# Altium PCB Lab7_Voloschuk.PcbDoc
Units mil, origin at the board's own origin, x right, y up, seen from the top; angles counter-clockwise.
Board outline 4800 x 4400 mil, 2 copper layers (Top Layer, Top, Bottom Layer, Bottom); 13 components, 9 nets, 32 pads, 3 vias.
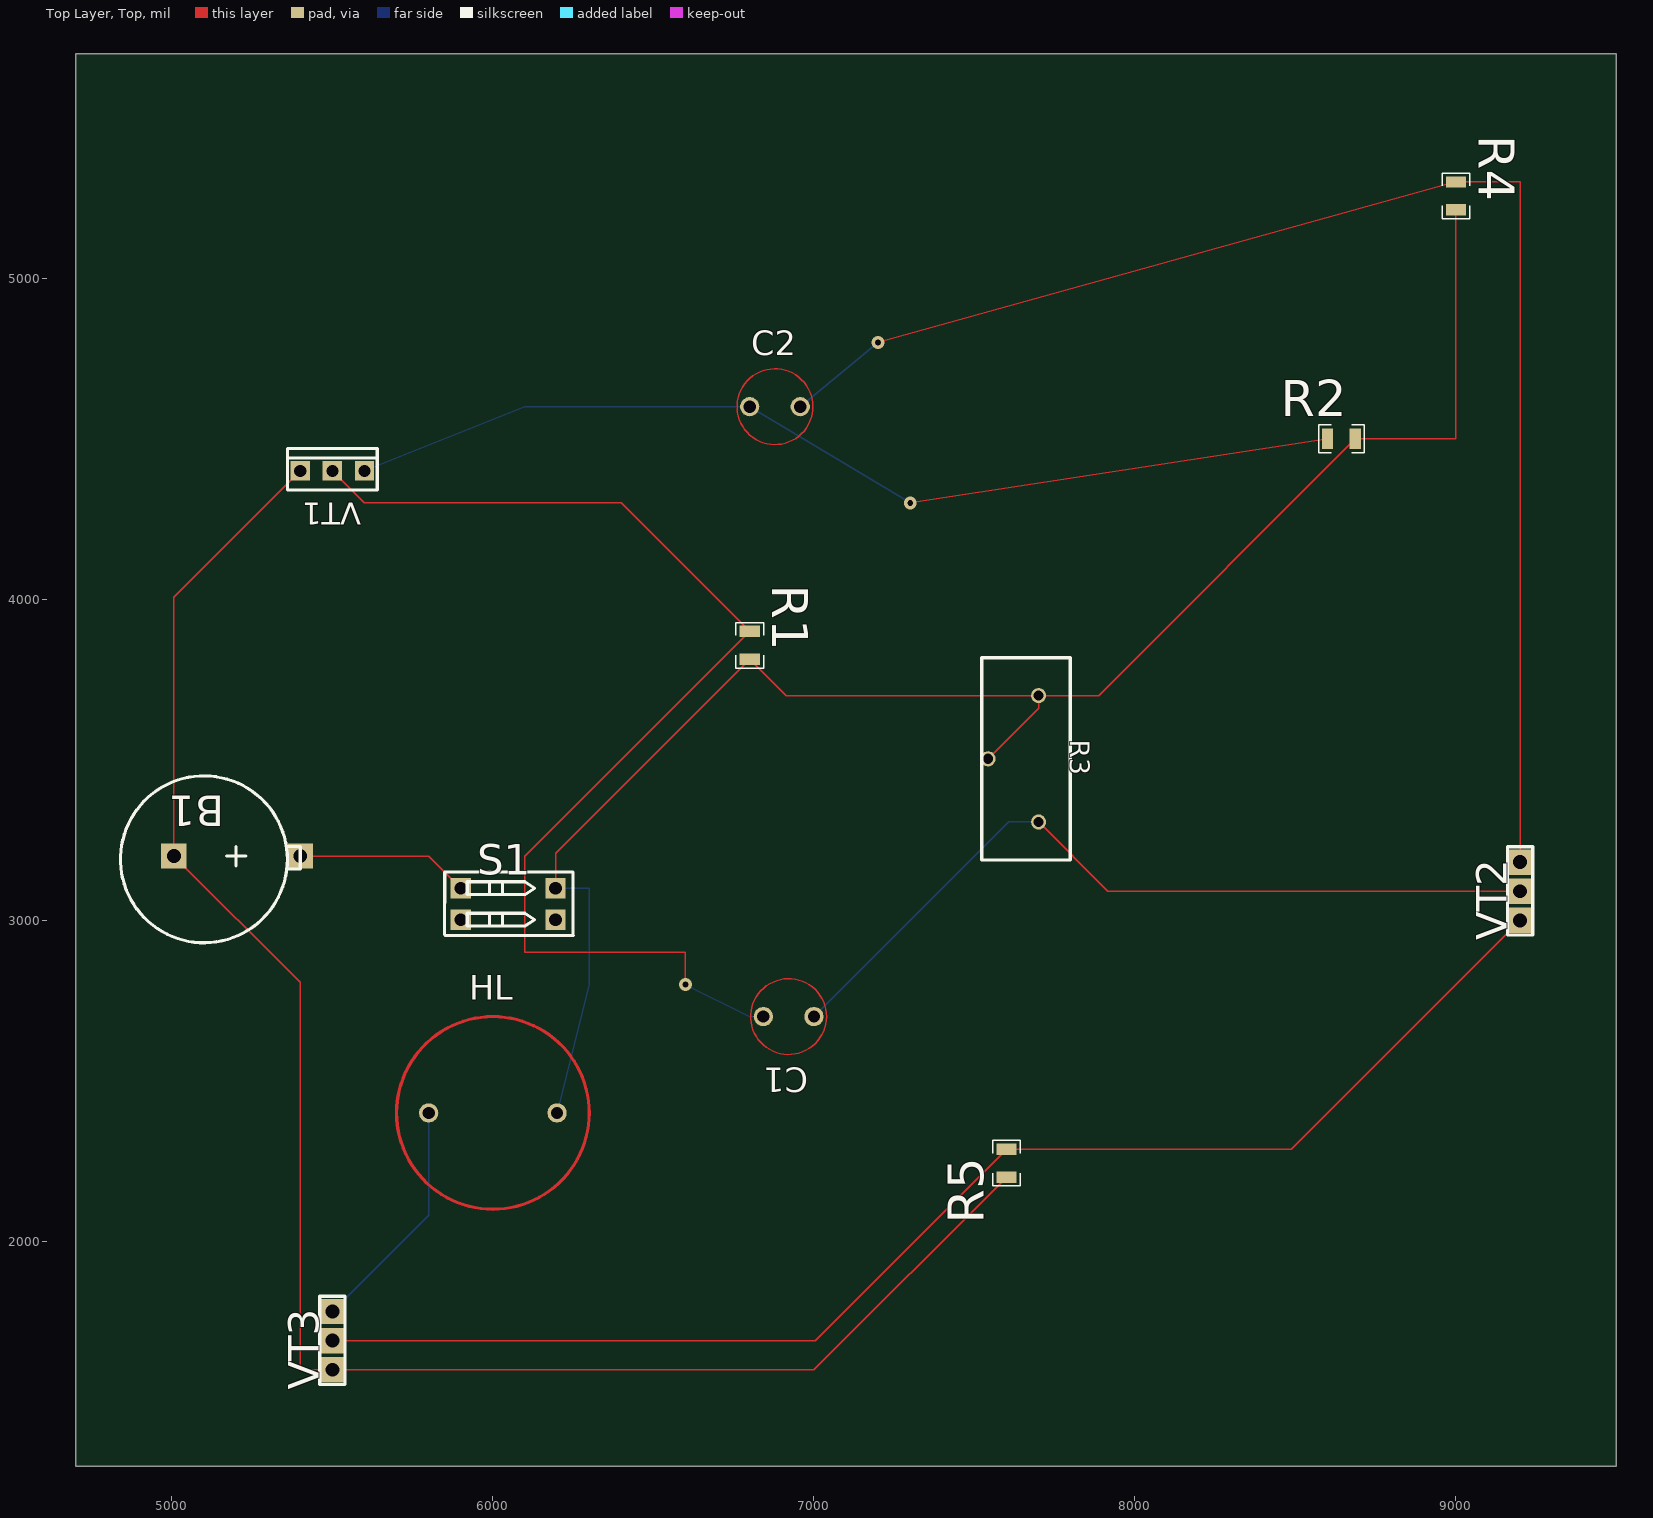
[diagram p0: Top Layer, Top view]
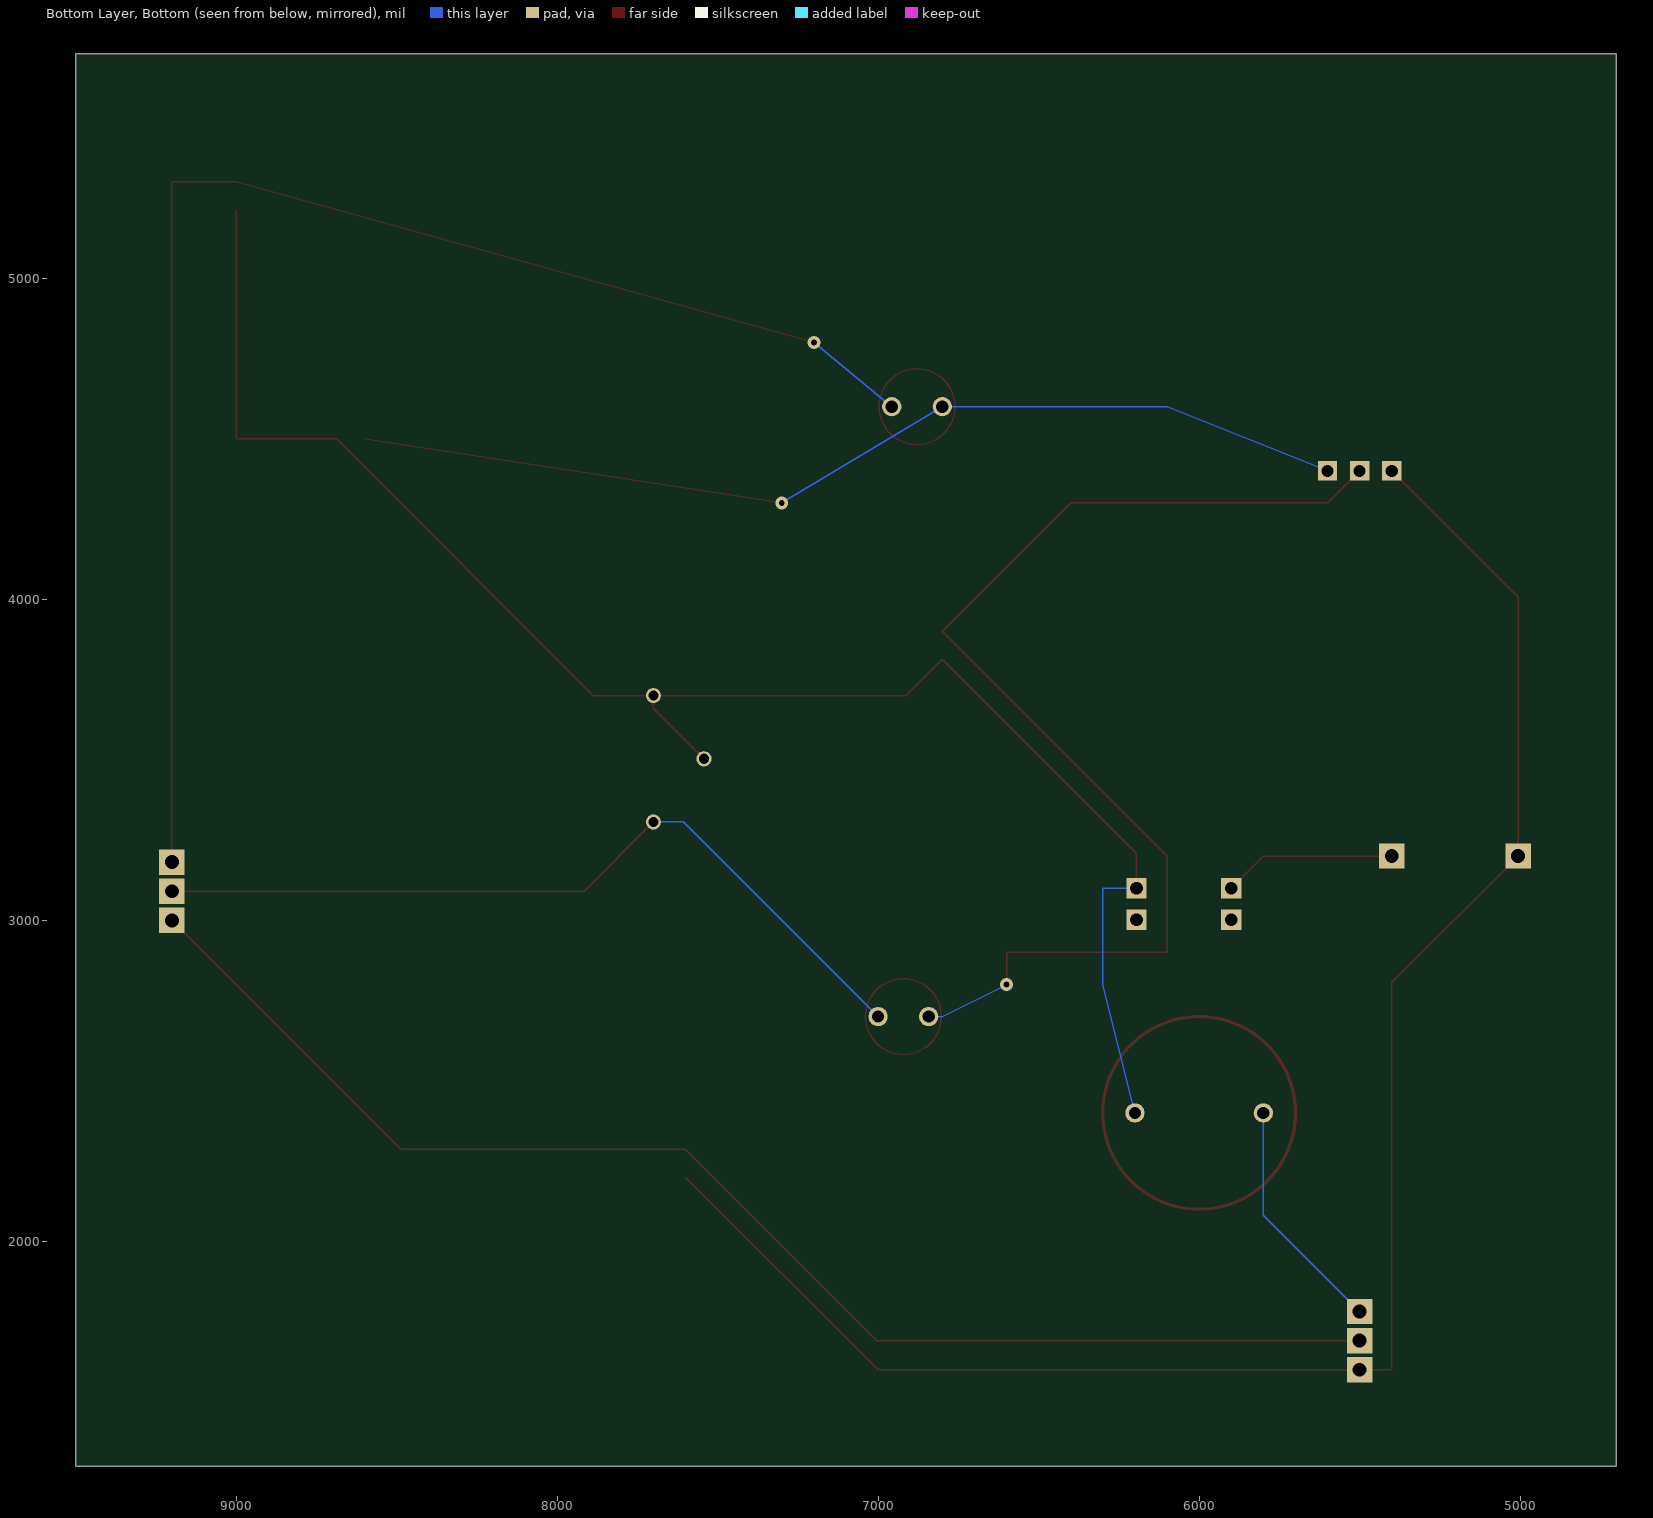
[diagram p1: Bottom Layer, Bottom view, seen from below]

## Layer stack, top to bottom
Top Solder, Top Mask: solder mask 0.4, Solder Resist, Dk 3.5
Top Layer, Top: signal copper 1.4
Dielectric 1: dielectric 12.6, FR-4, Dk 4.8
Bottom Layer, Bottom: signal copper 1.4
Bottom Solder, Bot Mask: solder mask 0.4, Solder Resist, Dk 3.5

## Board outline
4700,1300 9500,1300 9500,5700 4700,5700

## Design rules (kind name [scope] priority, off if disabled: settings)
Clearance [All] p1: gap=10 ignorepadtopadclearanceinfootprint=FALSE except(0: Arc-Hole Track-Hole SMDPad-Hole THPad-Hole Via-Hole Fill-Hole Poly-Hole Region-Hole Text-Hole; 11.81: Arc-Arc Arc-Track Arc-THPad Arc-Via Track-Track Track-THPad Track-Via THPad-THPad THPad-Via Via-Via)
PlaneClearance [All] p1: clearance=10
PolygonConnect [All] p1: connectstyle=Relief reliefconductorwidth=10 reliefentries=4 polygonreliefangle="90 Angle" airgapwidth=10
RoomDefinition "" [All] p1: confinementstyle=ConfineIn formatcopy=TRUE lockcomponents=FALSE outline 4700,1300 9500,1300 9500,5700 4700,5700
RoutingVias [All] p1: holewidth=28 width=50 viastyle="Through Hole" minholewidth=28 minwidth=50 maxholewidth=28 maxwidth=50
SolderMaskExpansion [All] p1: expansion=4
Width [All] p1: maxlimit=10 minlimit=10 preferedwidth=10
29 further rules are at their usual default settings.

## Components (designator, comment, footprint, x,y, rotation, side; value= is the part's Value field where it differs from the comment)
B1 "4,5B" BATAR 5400,3200 r180 top
C1 "50mk x 6B" CAP2 7000,2700 r180 top
C2 "10mk x 6B" CAP2 6800,4600 r0 top
HL "{Value}" HL 5800,2400 r0 top
R1 "1.5k" SMD_08_05 6800,3900 r270 top
R2 "20k" SMD_08_05 8600,4500 r0 top
R3 "150k" ÑÏ3-38Â 7700,3700 r270 top
R4 "1.5k" SMD_08_05 9000,5300 r270 top
R5 "160" SMD_08_05 7600,2200 r90 top
S1 "" BDM1-2 5900,3100 r0 top
VT1 "{Value}" 室315 5600,4400 r180 top
VT2 "" KT27 9200,3000 r90 top
VT3 "" KT27 5500,1600 r90 top

## Footprints (in the part's own frame and the unit in brackets; to place one, negate y for a bottom-side part, rotate by r counter-clockwise, add the part's x,y. Pads: shape width x height; smd on the part's side, far side on the other; paste and mask are expansions set on the pad)
BATAR [mm]
  rect 2x2 hole 1.1: 1(0,0) 2(10,0)
  silkscreen extent 0,-6.35 14.22,6.86
BDM1-2 [mm]
  rect 1.6x1.6 hole 1: 1(0,0) 2(0,-2.5) 3(7.5,-2.5) 4(7.5,0)
  silkscreen extent -1.28,-3.74 8.9,1.27
CAP2 [mil]
  round 60 hole 38: 1(0,0) 2(157.48,0)
  Top Layer, Top circle w3.94: c78.74,0 r118.11
HL [mil]
  round 60 hole 38: 1(0,0) 2(400,0)
  Top Layer, Top circle w10: c200,0 r300
KT27 [mm]
  rect 2x2 hole 1.1: 1(0,0) 2(2.3,0) 3(4.6,0)
  silkscreen extent -1.17,-0.99 5.82,0.99
SMD_08_05 [mm]
  rect 0.9x1.6 smd: 1(0,0) 2(2.2,0)
  silkscreen extent -0.7,-1.1 2.9,1.1
ÑÏ3-38Â [mm]
  round 1.2 hole 0.8: 1(0,0) 2(10,0) 3(5,-4)
  silkscreen extent -3,-4.5 13,2.5
室315 [mil]
  rect 60x60 hole 38: 1(0,0) 2(100,0) 3(200,0)
  silkscreen extent -40,-70 240,60

## Via types
v1: diameter 40, hole 18, Top Layer, Top to Bottom Layer, Bottom, 3 vias

## Nets (pads, with @x,y where several pads share a name; then routed paths per layer and width w, separated by ;. In a path a pad name is that pad's centre, name@x,y a point inside that pad or via, vN(x,y) a via of type N, cw(c..) or ccw(c..) an arc to the next point about the centre after c; other vN are vias at no path point)
NET00000: C1.2 R1.1 VT1.2 | length 3663.2
  Top Layer, Top w3.94: VT1.2 5600,4300 6400,4300 R1.1 6100,3200 6100,2900 6600,2900 v1(6600,2800)
  Bottom Layer, Bottom w3.94: v1(6600,2800) 6800,2700 C1.2
NET00001: C1.1 R3.2 VT2.2 | length 2540.5
  Top Layer, Top w3.94: R3.2 7915.75,3090.55 VT2.2
  Bottom Layer, Bottom w3.94: C1.1 7606.3,3306.3 R3.2
NET00002: HL.2 R1.2 R2.2 R3.1 R3.3 R4.2 S1.4 | length 5334.7
  Top Layer, Top w3.94: S1.4 6195.28,3208.66 R1.2 6913.39,3700 R3.1 ; R3.3 7700,3660.63 R3.1 ; R4.2 9000,4500 R2.2 7886.61,3700 R3.1
  Bottom Layer, Bottom w3.94: S1.4 6300,3100 6300,2800 HL.2
NET00003: B1.1 S1.1 | length 541.4
  Top Layer, Top w3.94: B1.1 5800,3200 S1.1
NET00004: HL.1 VT3.3 | length 743.2
  Bottom Layer, Bottom w3.94: VT3.3 5800,2081.1 HL.1
NET00006: B1.2 R5.1 VT1.3 VT3.1 | length 5574.7
  Top Layer, Top w3.94: VT1.3 5006.3,4006.3 B1.2 5400,2806.3 5400,1600 VT3.1 7000,1600 R5.1
NET00007: R5.2 VT2.1 VT3.2 | length 4242.4
  Top Layer, Top w3.94: VT3.2 7003.94,1690.55 R5.2 8486.61,2286.61 VT2.1
NET00009: C2.1 R2.1 VT1.1 | length 3136.9
  Top Layer, Top w3.94: v1(7300,4300) R2.1
  Bottom Layer, Bottom w3.94: VT1.1 6100,4600 C2.1 v1(7300,4300)
NET00010: C2.2 R4.1 VT2.3 | length 4501.4
  Top Layer, Top w3.94: v1(7200,4800) R4.1 9200,5300 VT2.3
  Bottom Layer, Bottom w3.94: C2.2 v1(7200,4800)
pads on no net: S1.2 S1.3